# EAGLE board version_beta01 (EAGLE 5.11)
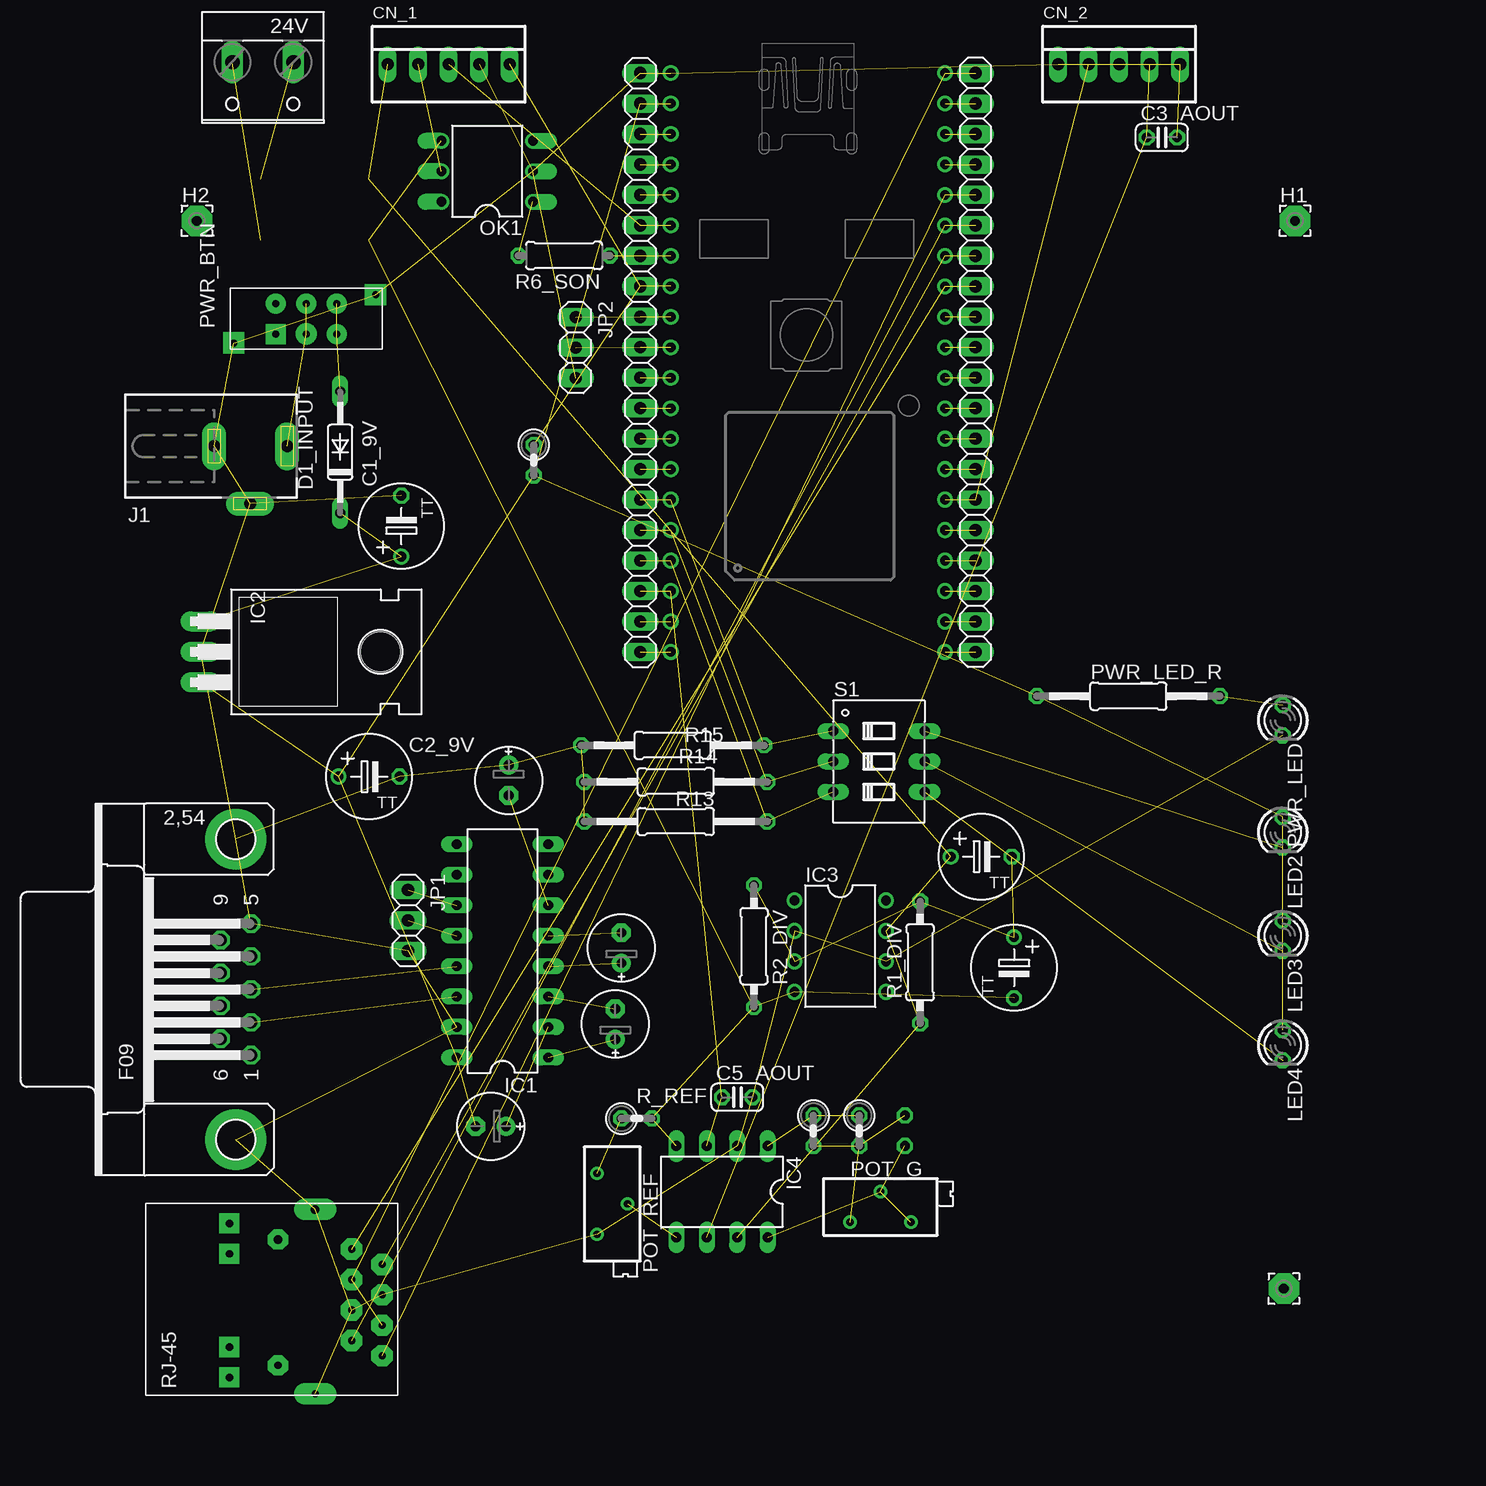
[diagram p0: board, top side]
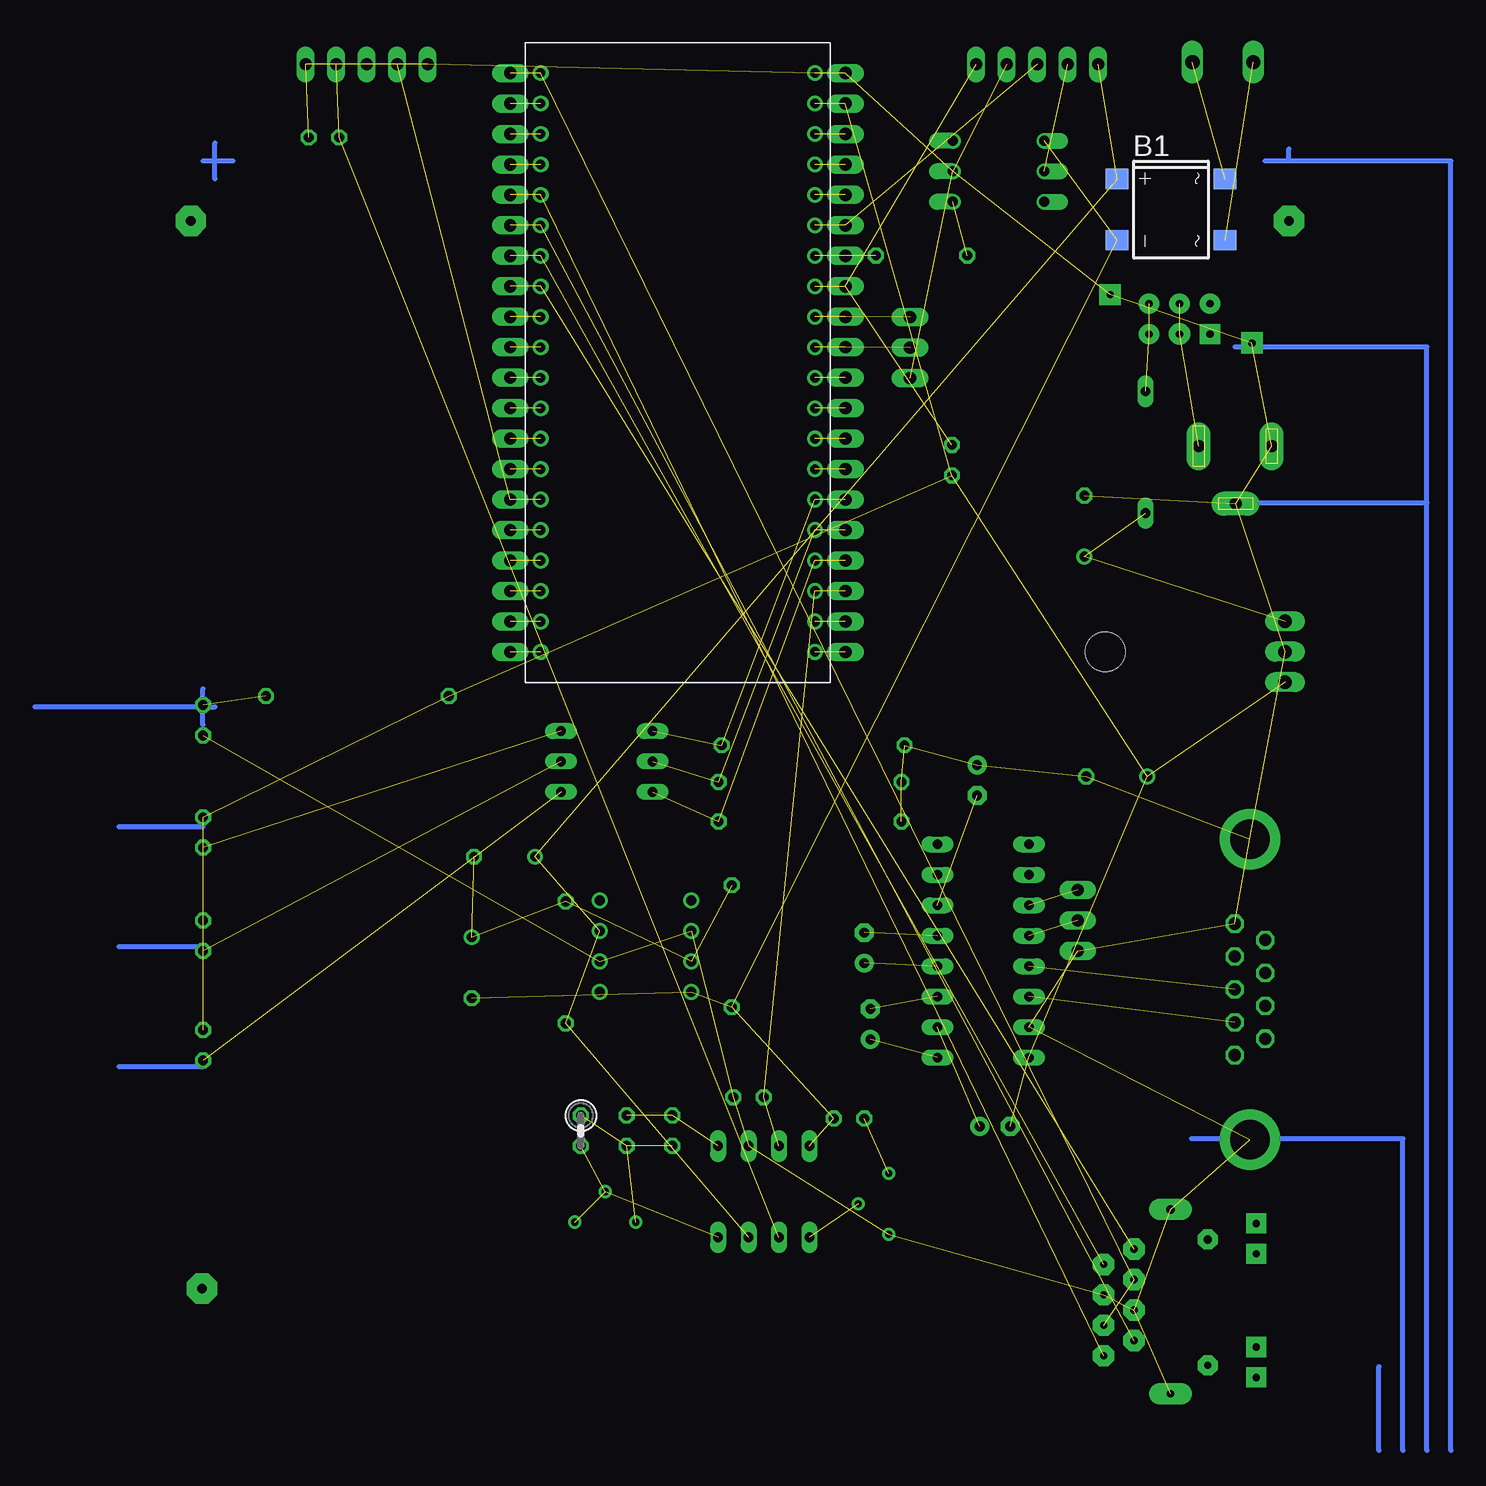
[diagram p1: board, bottom side, seen from below]

No outline drawn. Coordinates in mm, seen from the top.
Copper layers (1*16): Top 0.035mm / dielectric 1.5mm / Bottom 0.035mm
Design rules "default": minimum track width 10mil, minimum drill 24mil, track to track 8mil, track to pad 8mil, pad to pad 8mil, via to via 8mil, smd to smd 8mil, copper to edge 40mil, drill to drill 8mil, minimum pad ring 10mil, minimum via ring 8mil, stop-mask expansion 4mil, vias tented up to drill 0mil, thermal gap 10mil

## Footprints (pad centres in the part's own frame; a part is rotated, then mirrored left to right if it is on the bottom)
W237-132 = drill 1.194 long: 1 -2.54,-0.635; 2 2.54,-0.635
DBS = smd 1.7 x 1.9: + -2.55,-4.5; - 2.55,-4.5; AC1 -2.55,4.5; AC2 2.55,4.5
TT5D7 = drill 0.813 round: + -2.54,0 | drill 0.813 octagon: - 2.54,0
E2,5-6E = drill 0.813 pad 1.575 round: + -1.27,0 | drill 0.813 pad 1.575 octagon: - 1.27,0
C025-024X044 = drill 0.813 octagon: 1 -1.27,0; 2 1.27,0
22-23-2051 = drill 1 long: 1 -5.08,0; 2 -2.54,0; 3 0,0; 4 2.54,0; 5 5.08,0
DO35-10 = drill 0.813 long: A 5.08,0; C -5.08,0
2,54/0,8 = drill 0.813 pad 2.54 octagon: 1 0,0
DIL16 = drill 0.813 long: 1 -8.89,-3.81; 2 -6.35,-3.81; 3 -3.81,-3.81; 4 -1.27,-3.81; 5 1.27,-3.81; 6 3.81,-3.81; 7 6.35,-3.81; 8 8.89,-3.81; 9 8.89,3.81; 10 6.35,3.81; 11 3.81,3.81; 12 1.27,3.81; 13 -1.27,3.81; 14 -3.81,3.81; 15 -6.35,3.81; 16 -8.89,3.81
TO220H = drill 1.118 long: 1 -2.54,-10.16; 2 0,-10.16; 3 2.54,-10.16 | hole 3.302: 0,4.826
DIL08 = drill 0.813 pad 1.27 round: 1 -3.81,-3.81; 2 -1.27,-3.81; 3 1.27,-3.81; 4 3.81,-3.81; 5 3.81,3.81; 6 1.27,3.81; 7 -1.27,3.81; 8 -3.81,3.81
DIL08' = drill 0.813 long: 1 -3.81,-3.81; 2 -1.27,-3.81; 3 1.27,-3.81; 4 3.81,-3.81; 5 3.81,3.81; 6 1.27,3.81; 7 -1.27,3.81; 8 -3.81,3.81
DCJ0303 = drill 1 pad 2 long: 1 0,3.1; 2 4.8,0; 3 0,-3
1X03 = drill 1.016 long: 1 -2.54,0; 2 0,0; 3 2.54,0
1X20 = drill 1.016 long: 1 -24.13,0; 2 -21.59,0; 3 -19.05,0; 4 -16.51,0; 5 -13.97,0; 6 -11.43,0; 7 -8.89,0; 8 -6.35,0; 9 -3.81,0; 10 -1.27,0; 11 1.27,0; 12 3.81,0; 13 6.35,0; 14 8.89,0; 15 11.43,0; 16 13.97,0; 17 16.51,0; 18 19.05,0; 19 21.59,0; 20 24.13,0
MBED-KIT = drill 0.8 round: D+ 11.43,1.27; D- 11.43,3.81; GND -11.43,24.13; IF+ 11.43,16.51; IF- 11.43,19.05; NR -11.43,16.51; P$5 -11.43,13.97; P$6 -11.43,11.43; P$7 -11.43,8.89; P$8 -11.43,6.35; P$9 -11.43,3.81; P$10 -11.43,1.27; P$11 -11.43,-1.27; P$12 -11.43,-3.81; P$13 -11.43,-6.35; P$14 -11.43,-8.89; P$15 -11.43,-11.43; P$16 -11.43,-13.97; P$17 -11.43,-16.51; P$18 -11.43,-19.05; P$19 -11.43,-21.59; P$20 -11.43,-24.13; P$21 11.43,-24.13; P$22 11.43,-21.59; P$23 11.43,-19.05; P$24 11.43,-16.51; P$25 11.43,-13.97; P$26 11.43,-11.43; P$27 11.43,-8.89; P$28 11.43,-6.35; P$29 11.43,-3.81; P$30 11.43,-1.27; RD+ 11.43,11.43; RD- 11.43,13.97; TD+ 11.43,6.35; TD- 11.43,8.89; VB -11.43,19.05; VIN -11.43,21.59; VOUT 11.43,24.13; VU 11.43,21.59
LED3MM = drill 0.813 octagon: A -1.27,0; K 1.27,0
DIL06 = drill 0.813 offset: 1 -2.54,-3.81; 2 0,-3.81; 3 2.54,-3.81; 4 2.54,3.81; 5 0,3.81; 6 -2.54,3.81
RTRIMT93XB = drill 0.61 round: 1 1.27,-2.54; 2 -1.27,0; 3 1.27,2.54
0207/15 = drill 0.813 octagon: 1 -7.62,0; 2 7.62,0
0207/10 = drill 0.813 octagon: 1 -5.08,0; 2 5.08,0
0207/2V = drill 0.813 octagon: 1 -1.27,0; 2 1.27,0
0207/7 = drill 0.813 octagon: 1 -3.81,0; 2 3.81,0
DIP03YL = drill 0.813 long: 1 -2.54,-3.81; 2 0,-3.81; 3 2.54,-3.81; 4 2.54,3.81; 5 0,3.81; 6 -2.54,3.81
RJ45-GENERIC = drill 0.6 pad 1.778 octagon: P1 12.2,19.685; P2 10.93,17.145; P3 9.66,19.685; P4 8.39,17.145; P5 7.12,19.685; P6 5.85,17.145; P7 4.58,19.685; P8 3.31,17.145 | drill 0.6 pad 1.676 square: PAAMA 1.17,6.958; PAV 11.465,6.958; PKAM 3.71,6.958; PKV 14.005,6.958 | drill 0.6 pad 1.778 long: PSHIEL2 15.375,14.105 | drill 0.7 pad 1.778 long: PSHIELD1 0,14.105 | drill 0.7 pad 1.676 octagon: PSTAND 2.5,11.008 | drill 0.6 pad 1.676 octagon: PSTAND2 13,11.008
BOTON_ENCNEDIDO = drill 0.6 pad 1.778 square: G1 -2.019,6.039; G2 2.018,-5.785 | drill 0.6 pad 1.676 square: P1 -1.27,2.54 | drill 0.6 pad 1.778 round: P2 -1.27,0 | drill 0.6 pad 1.676 round: P3 -1.27,-2.54; P4 1.27,-2.54; P5 1.27,0; P6 1.27,2.54
F09HP = drill 1.016 octagon: 1 -5.486,-1.27; 2 -2.743,-1.27; 3 0,-1.27; 4 2.743,-1.27; 5 5.486,-1.27; 6 -4.115,1.27; 7 -1.372,1.27; 8 1.372,1.27; 9 4.115,1.27 | drill 3.302 pad 5.08 round: G1 -12.522,0; G2 12.522,0

## Placement (x,y rotation side)
24V  [W237-132]  10,115.11 180 top
B1  DBLS201G  [DBS]  14.32,103.46 270 bottom
C1_9V  [TT5D7]  21.54,77.07 90 top
C1_+24  [TT5D7]  69.87,49.51 0 top
C1_MAX  [E2,5-6E]  39.37,35.56 90 top
C2_0V  [TT5D7]  72.6,40.26 270 top
C2_9V  [TT5D7]  18.85,56.19 0 top
C2_MAX  [E2,5-6E]  39.88,41.91 90 top
C3_AOUT  [C025-024X044]  84.92,109.47 0 top
C3_MAX  [E2,5-6E]  30.48,55.88 270 top
C4_MAX  [E2,5-6E]  28.99,27.04 180 top
C5_AOUT  [C025-024X044]  49.53,29.46 0 top
CN_1  22-23-2051  [22-23-2051]  25.48,115.57 0 top
CN_2  22-23-2051  [22-23-2051]  81.36,115.57 0 top
D1_INPUT  1N4148  [DO35-10]  16.45,83.23 90 top
H1  MOUNT-HOLE2.8  [2,54/0,8]  96.01,102.52 0 top
H2  MOUNT-HOLE2.8  [2,54/0,8]  4.5,102.52 0 top
H3  MOUNT-HOLE2.8  [2,54/0,8]  95.08,13.51 0 top
IC1  MAX232  [DIL16]  29.97,41.66 90 top
IC2  7805T  [TO220H]  14.98,66.6 270 top
IC3  MCP601P  [DIL08]  58.12,42.05 270 top
IC4  AD620N  [DIL08']  48.26,21.59 180 top
J1  [DCJ0303]  8.93,83.74 270 top
JP1  [1X03]  22.1,44.2 270 top
JP2  [1X03]  36.07,91.95 270 top
JP_LEFT  [1X20]  41.45,90.71 90 top
JP_RIGHT  [1X20]  69.39,90.71 270 top
KIT1  MBED_NXP_LPC1768  [MBED-KIT]  55.42,90.71 0 top
LED2  [LED3MM]  94.98,51.54 270 top
LED3  [LED3MM]  94.98,42.92 270 top
LED4  [LED3MM]  94.98,33.8 270 top
OK1  4N25M  [DIL06]  28.69,106.66 90 top
POT_G  [RTRIMT93XB]  61.47,20.32 270 top
POT_REF  [RTRIMT93XB]  39.12,20.57 180 top
PWR_LED  [LED3MM]  94.98,60.89 270 top
PWR_LED_R  330  [0207/15]  82.12,62.9 0 top
R1_DIV  [0207/10]  64.77,40.7 90 top
R1_G  [0207/2V]  59.69,26.67 270 top
R2_DIV  [0207/10]  50.93,42.05 270 top
R2_G  [0207/2V]  63.5,26.67 270 bottom
R3_G  [0207/2V]  55.88,26.67 270 top
R6_SON  [0207/7]  35.11,99.63 180 top
R13  [0207/15]  44.4,52.45 0 top
R14  [0207/15]  44.4,55.75 0 top
R15  [0207/15]  44.15,58.8 0 top
R16_ALM  [0207/2V]  32.58,82.57 270 top
R_REF  [0207/2V]  41.15,27.69 0 top
S1  [DIP03YL]  61.34,57.45 270 top
U$1  RJ-45-GENERIC  [RJ45-GENERIC]  0.25,20.11 270 top
U$2  BOTON_ENCENDIDO  [BOTON_ENCNEDIDO]  13.61,94.35 90 top
X1  [F09HP]  7.74,38.45 90 top

## Library data of the parts
24V = con-wago-508
B1 = rectifier
C1_9V C1_+24 C1_MAX C2_0V C2_9V C2_MAX C3_AOUT C3_MAX C4_MAX C5_AOUT POT_G POT_REF PWR_LED_R R1_G R2_G R3_G R6_SON R13-R15 R16_ALM R_REF = rcl
CN_1 CN_2 = con-molex
D1_INPUT = diode
H1-H3 = wirepad
IC1 = maxim
IC2 IC3 = linear
IC4 = analog-devices
J1 = con-jack
JP1 JP2 JP_LEFT JP_RIGHT = pinhead
KIT1 = MBED_v2.1
LED2-LED4 PWR_LED = led
OK1 = optocoupler
R1_DIV R2_DIV = resistor
S1 = switch-dil
U$1 = RJ45
U$2 = Boton_Encendido
X1 = con-subd

## Nets
ALM: CN_1.5 JP_LEFT.13 KIT1.P$8 R16_ALM.1
AOUT: C5_AOUT.1 IC4.3 JP_LEFT.3 KIT1.P$18
GND: C1_9V.- C2_9V.- C3_AOUT.2 C3_MAX.+ C5_AOUT.2 CN_1.4 CN_2.1 CN_2.3 CN_2.5 IC1.15 IC2.2 IC3.2 IC3.6 IC4.2 J1.2 J1.3 JP1.3 JP2.3 JP_LEFT.20 KIT1.GND OK1.2 POT_REF.3 PWR_LED.K R13.1 R14.1 R15.1 U$1.P4 U$1.P5 U$1.PSHIEL2 U$1.PSHIELD1 U$2.G1 U$2.G2 X1.5 X1.G1 X1.G2
N$1: B1.+ C1_+24.+ CN_1.1 IC3.7 IC4.7 R1_DIV.1
N$2: B1.- C2_0V.- IC3.4 IC4.4 OK1.4 R2_DIV.2 R_REF.2
N$3: C1_+24.- C2_0V.+ IC3.3 R1_DIV.2 R2_DIV.1
N$4: CN_1.2 OK1.5
N$5: JP_RIGHT.2 KIT1.VU
N$6: C3_AOUT.1 CN_2.4 IC4.6
N$7: JP_RIGHT.3 KIT1.IF-
N$8: POT_REF.1 R_REF.1
N$9: IC4.1 R1_G.1 R3_G.1
N$10: POT_G.1 R1_G.2 R2_G.1 R3_G.2
N$11: IC4.8 POT_G.2 POT_G.3 R2_G.2
N$12: D1_INPUT.A U$2.P3 U$2.P4
N$13: JP_LEFT.5 KIT1.P$16 R14.2 S1.2
N$14: JP_RIGHT.4 KIT1.IF+
N$15: IC4.5 POT_REF.2
N$16: JP_RIGHT.11 KIT1.P$30
N$17: OK1.1 R6_SON.2
N$18: J1.1 U$2.P2 U$2.P5
N$19: JP_LEFT.4 KIT1.P$17 R13.2 S1.3
N$20: JP_RIGHT.1 KIT1.VOUT U$1.P3 U$1.P6
N$21: C1_9V.+ D1_INPUT.C IC2.1
N$22: IC1.11 JP1.1
N$23: IC1.12 JP1.2
N$24: LED2.K S1.6
N$25: LED3.K S1.5
N$26: LED4.K S1.4
N$27: JP_RIGHT.5 KIT1.RD- U$1.P1
N$28: JP_RIGHT.6 KIT1.RD+ U$1.P2
N$29: JP_RIGHT.7 KIT1.TD- U$1.P7
N$30: JP_RIGHT.8 KIT1.TD+ U$1.P8
N$31: JP_RIGHT.9 KIT1.D-
N$32: JP_RIGHT.10 KIT1.D+
N$33: C1_MAX.+ IC1.1
N$34: C1_MAX.- IC1.3
N$35: C2_MAX.- IC1.5
N$36: C2_MAX.+ IC1.4
N$37: C4_MAX.+ IC1.2
N$38: C3_MAX.- IC1.6
N$39: JP_RIGHT.13 KIT1.P$28
N$40: IC1.14 X1.2
N$41: IC1.13 X1.3
N$42: JP_RIGHT.18 KIT1.P$23
N$43: JP_RIGHT.19 KIT1.P$22
N$44: JP_RIGHT.14 KIT1.P$27
N$45: JP_RIGHT.16 KIT1.P$25
N$47: JP_RIGHT.17 KIT1.P$24
N$48: JP_LEFT.18 KIT1.VB
N$49: JP_LEFT.17 KIT1.NR
N$50: JP_LEFT.16 KIT1.P$5
N$51: JP_LEFT.14 KIT1.P$7 R6_SON.1
N$53: JP_LEFT.10 KIT1.P$11
N$54: JP_LEFT.9 KIT1.P$12
N$55: JP_LEFT.8 KIT1.P$13
N$56: JP_LEFT.6 KIT1.P$15 R15.2 S1.1
N$57: JP_LEFT.7 KIT1.P$14
N$59: JP_LEFT.2 KIT1.P$19
N$60: JP_LEFT.1 KIT1.P$20
N$61: PWR_LED.A PWR_LED_R.2
N$62: JP_RIGHT.20 KIT1.P$21
N$64: 24V.1 B1.AC1
N$65: 24V.2 B1.AC2
PTO: CN_1.3 JP_LEFT.15 KIT1.P$6
RX: JP2.2 JP_LEFT.11 KIT1.P$10
SIGN: CN_2.2 JP_RIGHT.15 KIT1.P$26
SIGN+: JP_RIGHT.12 KIT1.P$29
TX: JP2.1 JP_LEFT.12 KIT1.P$9
VCC: C2_9V.+ C4_MAX.- IC1.16 IC2.3 JP_LEFT.19 KIT1.VIN LED2.A LED3.A LED4.A PWR_LED_R.1 R16_ALM.2

## Tracks (layer width: path | path; a pad name or v marks a point on that pad's centre or on a via)
ALM  (3 unrouted)
AOUT  (3 unrouted)
GND  (34 unrouted)
N$1  (5 unrouted)
N$2  (6 unrouted)
N$3  (4 unrouted)
N$4  (1 unrouted)
N$5  (1 unrouted)
N$6  (2 unrouted)
N$7  (1 unrouted)
N$8  (1 unrouted)
N$9  (2 unrouted)
N$10  (3 unrouted)
N$11  (3 unrouted)
N$12  (2 unrouted)
N$13  (3 unrouted)
N$14  (1 unrouted)
N$15  (1 unrouted)
N$16  (1 unrouted)
N$17  (1 unrouted)
N$18  (2 unrouted)
N$19  (3 unrouted)
N$20  (3 unrouted)
N$21  (2 unrouted)
N$22  (1 unrouted)
N$23  (1 unrouted)
N$24  (1 unrouted)
N$25  (1 unrouted)
N$26  (1 unrouted)
N$27  (2 unrouted)
N$28  (2 unrouted)
N$29  (2 unrouted)
N$30  (2 unrouted)
N$31  (1 unrouted)
N$32  (1 unrouted)
N$33  (1 unrouted)
N$34  (1 unrouted)
N$35  (1 unrouted)
N$36  (1 unrouted)
N$37  (1 unrouted)
N$38  (1 unrouted)
N$39  (1 unrouted)
N$40  (1 unrouted)
N$41  (1 unrouted)
N$42  (1 unrouted)
N$43  (1 unrouted)
N$44  (1 unrouted)
N$45  (1 unrouted)
N$46
  Bottom 0.406: -3,0 -3,7
N$47  (1 unrouted)
N$48  (1 unrouted)
N$49  (1 unrouted)
N$50  (1 unrouted)
N$51  (2 unrouted)
N$52
  Bottom 0.406: -5,0 -5,26 12.62,26
N$53  (1 unrouted)
N$54  (1 unrouted)
N$55  (1 unrouted)
N$56  (3 unrouted)
N$57  (1 unrouted)
N$58
  Bottom 0.406: -7,0 -7,79 | -7,79 10.32,79 | -7,79 -7,92 9,92
N$59  (1 unrouted)
N$60  (1 unrouted)
N$61  (1 unrouted)
N$62  (1 unrouted)
N$63
  Bottom 0.406: -9,0 -9,107.5 4.5,107.5 | 4.5,107.5 6.5,107.5 | 4.5,107.5 4.5,108.5
N$64  (1 unrouted)
N$65  (1 unrouted)
N$66
  Bottom 0.406: 94,109 94,107.5 94,106
N$67
  Bottom 0.406: 92.5,107.5 95,107.5
N$69
  Bottom 0.406: 95,62 95,63.5 | 95,60.5 95,62 | 95,62 94,62 | 95,62 109,62
N$70
  Bottom 0.406: 95,52 102,52
N$71
  Bottom 0.406: 95,42 102,42
N$72
  Bottom 0.406: 95,32 102,32
PTO  (2 unrouted)
RX  (2 unrouted)
SIGN  (2 unrouted)
SIGN+  (1 unrouted)
TX  (2 unrouted)
VCC  (10 unrouted)